# EAGLE board breakout (EAGLE 7.1.0)
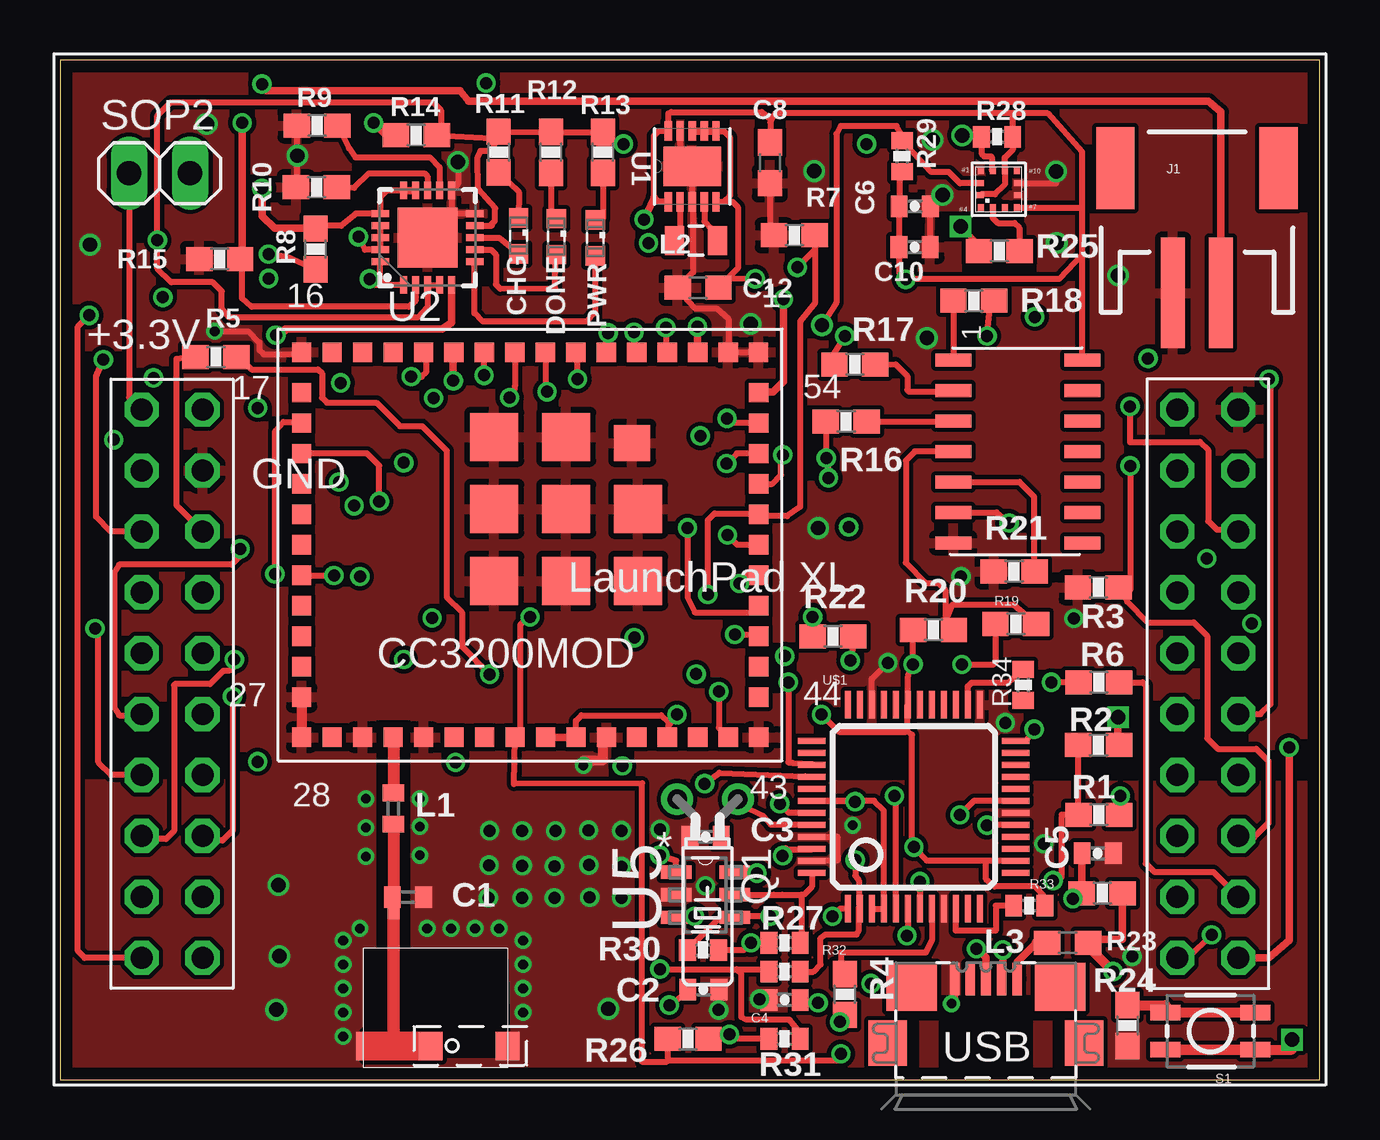
[diagram p0: board, top side]
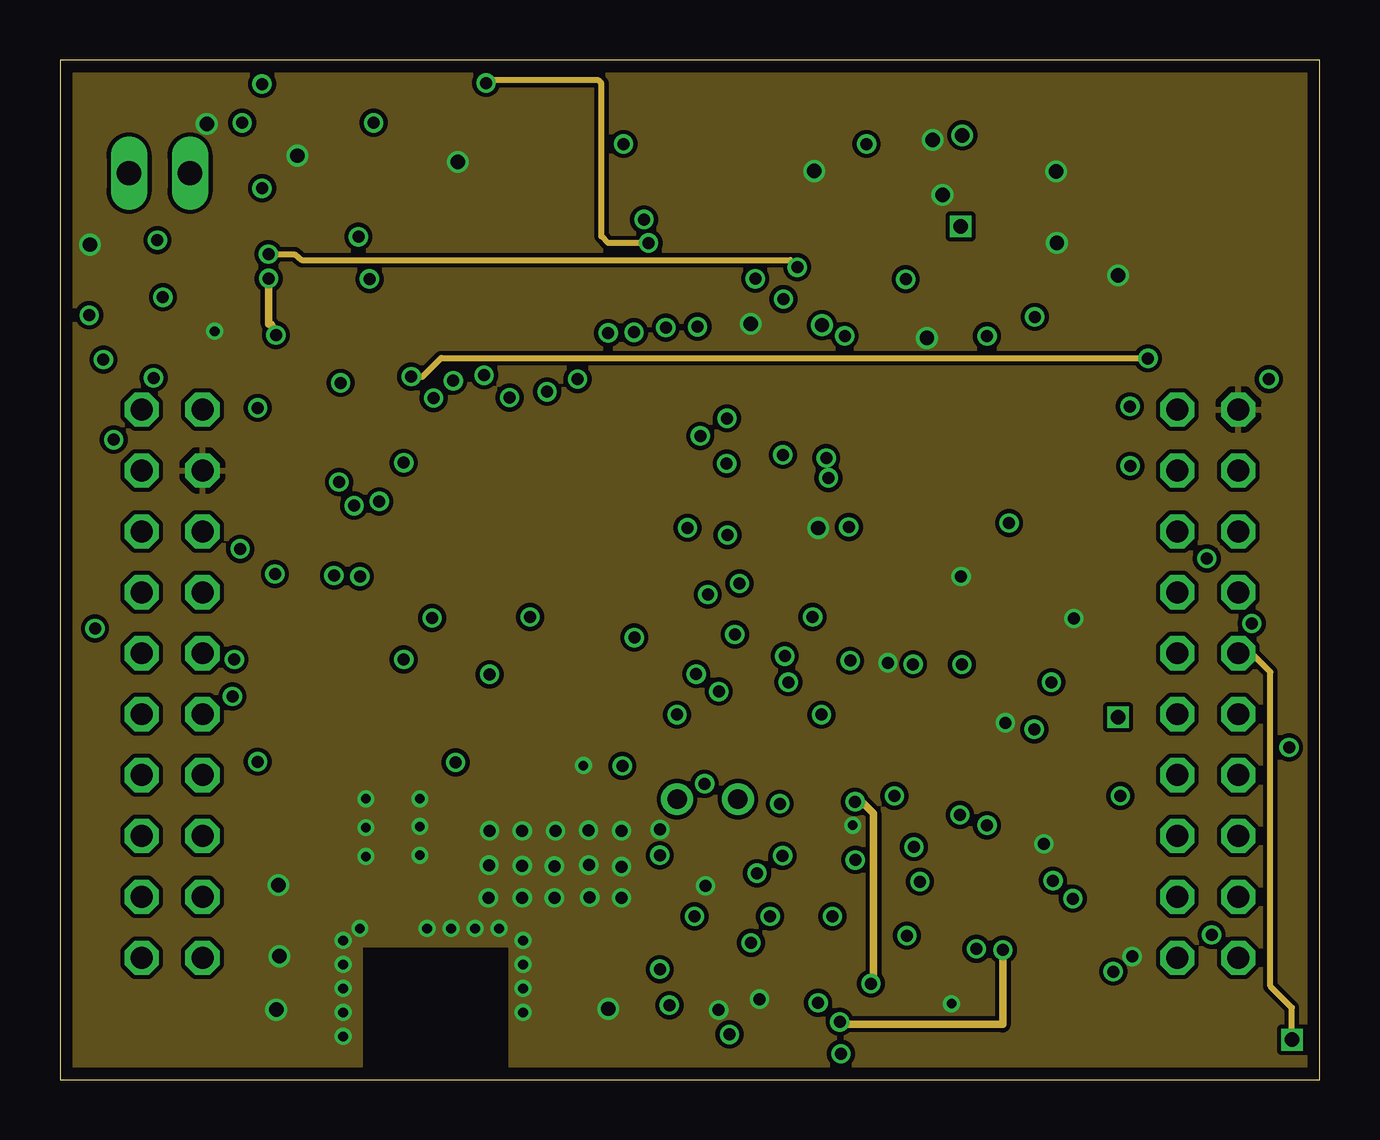
[diagram p1: board, inner layer Route2]
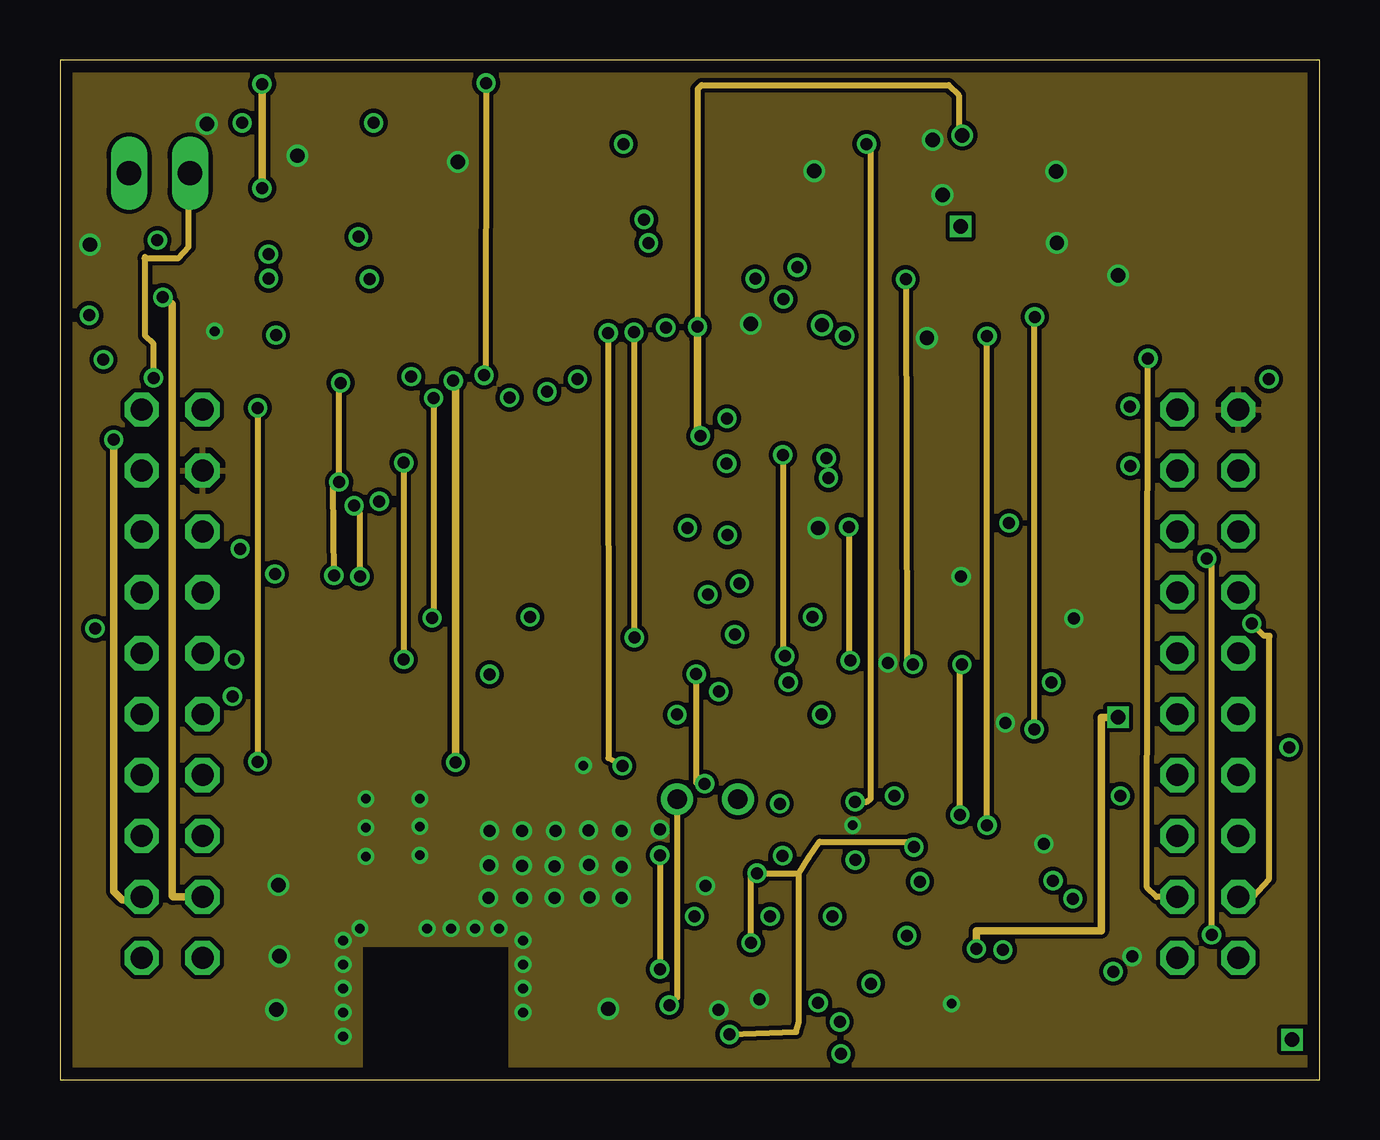
[diagram p2: board, inner layer Route15]
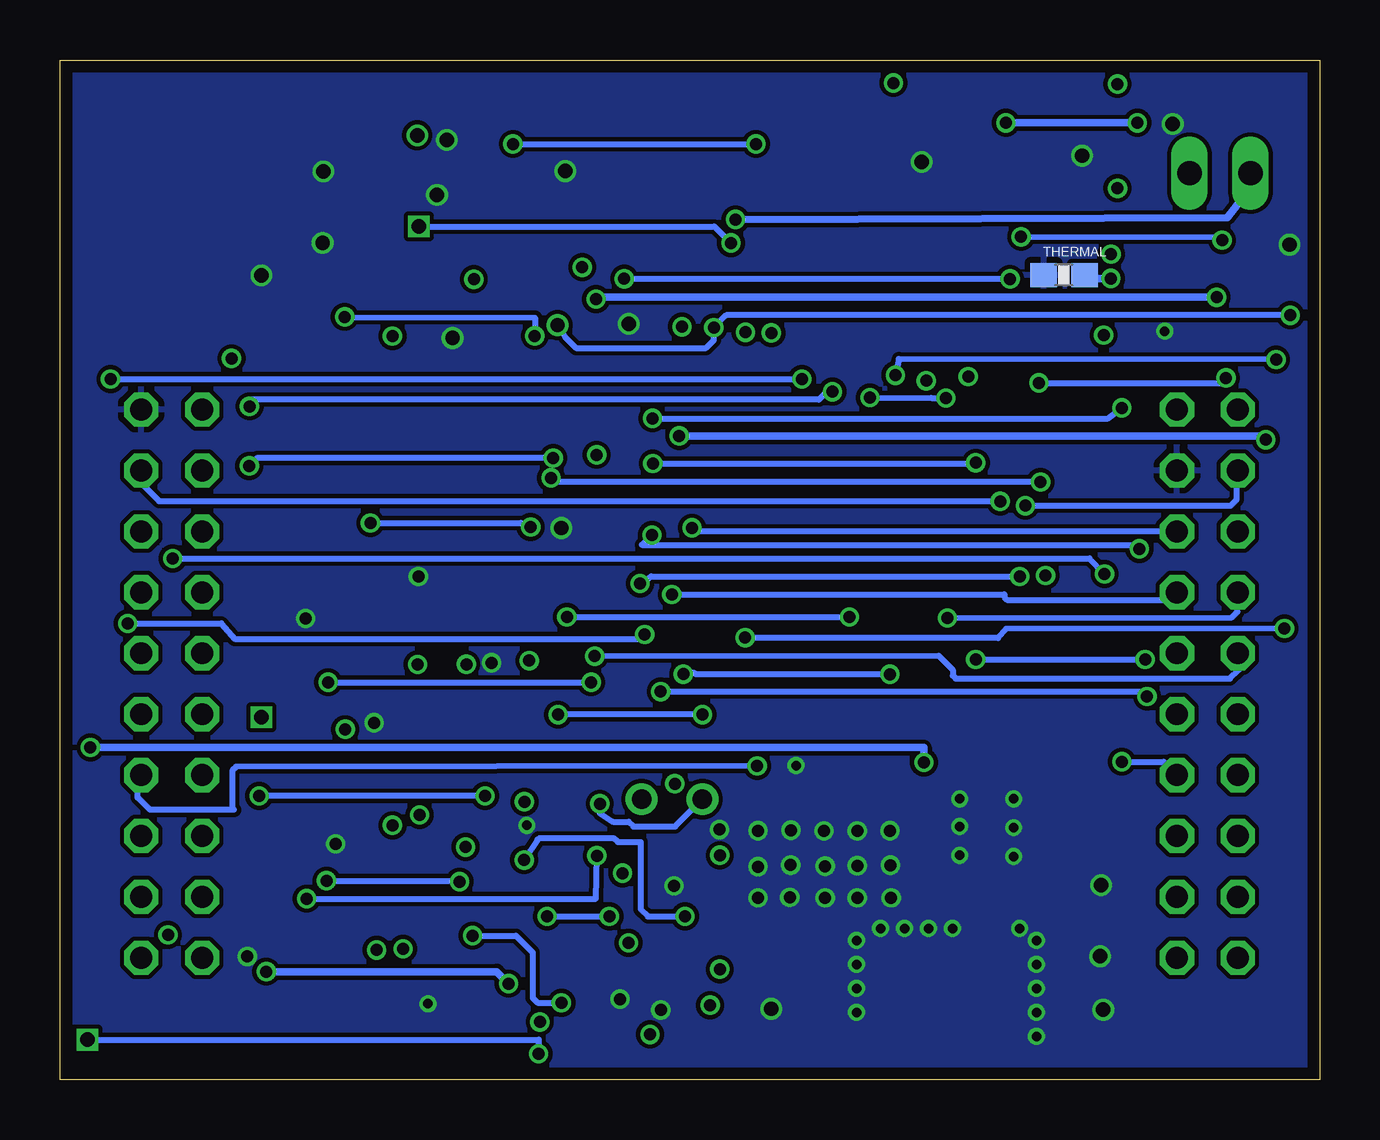
[diagram p3: board, bottom side, seen from below]

Size 52.5 x 42.5 mm. Coordinates in mm from the lower left corner, seen from the top.
Outline: 0,0 52.5,0 52.5,42.5 0,42.5 0,0
Copper layers (1*2*15*16): Top 0.035mm / dielectric 10mil / Route2 0.035mm / dielectric 10mil / Route15 0.035mm / dielectric 10mil / Bottom 0.035mm
Design rules "EagleRules *": minimum track width 7mil, minimum drill 12mil, track to track 7mil, track to pad 7mil, pad to pad 7mil, via to via 7mil, smd to smd 0mil, copper to edge 20mil, drill to drill 10mil, minimum pad ring 10mil, minimum via ring 6mil, stop-mask expansion 2mil, vias tented up to drill 25mil, thermal gap 10mil

## Footprints (pad centres in the part's own frame; a part is rotated, then mirrored left to right if it is on the bottom)
ANT = smd 1 x 1.2: ANT_FEED 2.8,0.9; ANT_GND 6,0.9 | smd 0.5 x 0.5: FEED2 1.25,6.45 | smd 0.3 x 1.2: GND_LEFT -0.15,0.9
C0402 = smd 0.7 x 0.9: 1 -0.65,0; 2 0.65,0
0402-CAP = smd 0.7 x 0.9: 1 -0.65,0; 2 0.65,0
C0603 = smd 1.1 x 1: 1 -0.85,0; 2 0.85,0
CC3200MOD = smd 0.8 x 0.8: P1 9.52,8.025; P2 8.25,8.025; P3 6.98,8.025; P4 5.71,8.025; P5 4.44,8.025; P6 3.17,8.025; P7 1.9,8.025; P8 0.63,8.025; P9 -0.64,8.025; P10 -1.91,8.025; P11 -3.18,8.025; P12 -4.45,8.025; P13 -5.72,8.025; P14 -6.99,8.025; P15 -8.26,8.025; P16 -9.53,8.025; P17 -9.525,6.35; P18 -9.525,5.08; P19 -9.525,3.81; P20 -9.525,2.54; P21 -9.525,1.27; P22 -9.525,0; P23 -9.525,-1.27; P24 -9.525,-2.54; P25 -9.525,-3.81; P26 -9.525,-5.08; P27 -9.525,-6.35; P28 -9.525,-8.02; P29 -8.255,-8.02; P30 -6.985,-8.02; P31 -5.715,-8.02; P32 -4.445,-8.02; P33 -3.175,-8.02; P34 -1.905,-8.02; P35 -0.635,-8.02; P36 0.635,-8.02; P37 1.905,-8.02; P38 3.175,-8.02; P39 4.445,-8.02; P40 5.715,-8.02; P41 6.985,-8.02; P42 8.255,-8.02; P43 9.525,-8.02; P44 9.525,-6.35; P45 9.525,-5.08; P46 9.525,-3.81; P47 9.525,-2.54; P48 9.525,-1.27; P49 9.525,0; P50 9.525,1.27; P51 9.525,2.54; P52 9.525,3.81; P53 9.525,5.08; P54 9.525,6.35 | smd 1.5 x 1.5: P55 4.25,4.25 | smd 2 x 2: P56 1.5,-1.5; P57 -1.5,4.5; P58 4.5,1.5; P59 1.5,1.5; P60 -1.5,1.5; P61 4.5,-1.5; P62 1.5,4.5; P63 -1.5,-1.5
SML0603 = smd 0.8 x 0.8: A 0.75,0; C -0.75,0
JST-2-SMD = smd 1 x 4.6: 1 -1,-3.7; 2 1,-3.7 | smd 1.6 x 3.4: NC1 -3.4,1.5; NC2 3.4,1.5
0805 = smd 0.8 x 1.2: 1 -0.9,0; 2 0.9,0
0603 = smd 1.1 x 1: 1 -0.85,0; 2 0.85,0
TC26H = drill 0.813: 1 -1.27,0; 2 1.27,0
0603-RES = smd 1.1 x 1: 1 -0.85,0; 2 0.85,0
0402-RES = smd 0.7 x 0.9: 1 -0.65,0; 2 0.65,0
TACTILE_SWITCH_SMD = smd 1.25 x 0.65: 1 -1.875,0.775; 2 1.875,0.775; 3 -1.875,-0.775; 4 1.875,-0.775
1X02 = drill 1.016 long: 1 -1.27,0; 2 1.27,0
SON50P300X300X100-11N = smd 0.813 x 0.305: 1 -1.473,0.991; 2 -1.473,0.508; 3 -1.473,0; 4 -1.473,-0.508; 5 -1.473,-0.991; 6 1.473,-0.991; 7 1.473,-0.508; 8 1.473,0; 9 1.473,0.508; 10 1.473,0.991 | smd 1.651 x 2.388: 11 0,0
QFN20-4X4 = smd 0.73 x 0.3: 1 -1.965,1; 2 -1.965,0.5; 3 -1.965,0; 4 -1.965,-0.5; 5 -1.965,-1; 11 1.965,-1; 12 1.965,-0.5; 13 1.965,0; 14 1.965,0.5; 15 1.965,1 | smd 0.3 x 0.73: 6 -1,-1.965; 7 -0.5,-1.965; 8 0,-1.965; 9 0.5,-1.965; 10 1,-1.965; 16 1,1.965; 17 0.5,1.965; 18 0,1.965; 19 -0.5,1.965; 20 -1,1.965 | smd 2.5 x 2.5: 21 0,0
SOT95P280X145-6N = smd 1.27 x 0.559: 1 -1.219,0.94; 2 -1.219,0; 3 -1.219,-0.94; 4 1.219,-0.94; 5 1.219,0; 6 1.219,0.94
LAUNCHPADXL = drill 0.914 octagon: 3.3V -22.86,8.16; 5V -20.32,8.16; GND1 -20.32,5.62; GND2 22.86,8.16; GPIO_00 -20.32,-14.7; GPIO_01 22.86,-12.16; GPIO_02 -20.32,3.08; GPIO_03 -22.86,5.62; GPIO_03_NC -20.32,-2; GPIO_04 -22.86,-4.54; GPIO_04_NC -20.32,-4.54; GPIO_05 -20.32,0.54; GPIO_05_NC 20.32,-9.62; GPIO_06 -22.86,-2; GPIO_07 -22.86,-9.62; GPIO_07_NC 20.32,-7.08; GPIO_08 -20.32,-7.08; GPIO_09 -20.32,-12.16; GPIO_09_GPIO_00_NC 20.32,0.54; GPIO_10 -22.86,-12.16; GPIO_10_NC 20.32,5.62; GPIO_11 -22.86,-14.7; GPIO_11_NC 20.32,8.16; GPIO_12_TX -22.86,0.54; GPIO_13_RX -22.86,3.08; GPIO_14_SP_CLK -22.86,-7.08; GPIO_15_MISO 22.86,-7.08; GPIO_16_MOSI 22.86,-4.54; GPIO_17_CS 22.86,3.08; GPIO_22 22.86,-14.7; GPIO_23 20.32,-12.16; GPIO_24 20.32,-14.7; GPIO_24_NC 20.32,3.08; GPIO_25 22.86,-9.62; GPIO_25_GPIO_07_NC 20.32,-2; GPIO_28 22.86,5.62; GPIO_28_NC 20.32,-4.54; GPIO_30 -20.32,-9.62; GPIO_31 22.86,0.54; RESET_OUT 22.86,-2
LQFP-48 = smd 0.254 x 1.143: 1 -2.75,-4.25; 2 -2.25,-4.25; 3 -1.75,-4.25; 4 -1.25,-4.25; 5 -0.75,-4.25; 6 -0.25,-4.25; 7 0.25,-4.25; 8 0.75,-4.25; 9 1.25,-4.25; 10 1.75,-4.25; 11 2.25,-4.25; 12 2.75,-4.25; 25 2.75,4.25; 26 2.25,4.25; 27 1.75,4.25; 28 1.25,4.25; 29 0.75,4.25; 30 0.25,4.25; 31 -0.25,4.25; 32 -0.75,4.25; 33 -1.25,4.25; 34 -1.75,4.25; 35 -2.25,4.25; 36 -2.75,4.25 | smd 1.143 x 0.254: 13 4.25,-2.75; 14 4.25,-2.25; 15 4.25,-1.75; 16 4.25,-1.25; 17 4.25,-0.75; 18 4.25,-0.25; 19 4.25,0.25; 20 4.25,0.75; 21 4.25,1.25; 22 4.25,1.75; 23 4.25,2.25; 24 4.25,2.75; 37 -4.25,2.75; 38 -4.25,2.25; 39 -4.25,1.75; 40 -4.25,1.25; 41 -4.25,0.75; 42 -4.25,0.25; 43 -4.25,-0.25; 44 -4.25,-0.75; 45 -4.25,-1.25; 46 -4.25,-1.75; 47 -4.25,-2.25; 48 -4.25,-2.75
DECADE-SO-14 = smd 0.55 x 1.5: 1 -3.6,-2.88; 2 -2.33,-2.88; 3 -1.06,-2.88; 4 0.21,-2.88; 5 1.48,-2.88; 6 2.75,-2.88; 7 4.02,-2.88; 8 4.02,2.5; 9 2.75,2.5; 10 1.48,2.5; 11 0.21,2.5; 12 -1.06,2.5; 13 -2.33,2.5; 14 -3.6,2.5
BMA222 = smd 0.25 x 0.3: P1 -0.75,0.775; P4 -0.75,-0.775; P5 -0.25,-0.775; P6 0.25,-0.775; P7 0.75,-0.775; P10 0.75,0.775; P11 0.25,0.775; P12 -0.25,0.775 | smd 0.3 x 0.25: P2 -0.775,0.25; P3 -0.775,-0.25; P8 0.775,-0.25; P9 0.775,0.25
ZX62R-B-5P = smd 1.35 x 0.4: 1 2.675,-1.3; 2 2.675,-0.65; 3 2.675,0; 4 2.675,0.65; 5 2.675,1.3 | smd 1.9 x 1.6: M1 0,-4.1; M2 0,4.1 | smd 2 x 2.1: M3 2.35,3.1; M4 2.35,-3.1

## Placement (x,y rotation side)
ANT_PAD  ANT  [ANT]  12.65,0.5 0 top
C1  1pF  [C0402]  14.5,7.6 0 top
C2  27pF  [0402-CAP]  26.82,3.75 180 top
C3  27pF  [0402-CAP]  26.91,10.12 0 top
C4  33nF  [0402-CAP]  30.2,3.32 0 top
C5  0.1uF  [0402-CAP]  43.25,9.43 180 top
C6  .1uF  [0402-CAP]  35.63,36.4 0 top
C8  10uF  [C0603]  29.59,38.22 270 top
C10  .1uF  [0402-CAP]  35.62,34.7 0 top
C12  10uF  [C0603]  26.6,33 180 top
CC3200MOD  CC3200  [CC3200MOD]  19.6,22.29 0 top
CHG  [SML0603]  19.11,35.17 270 top
DONE  [SML0603]  20.69,35.14 270 top
J1  [JST-2-SMD]  47.39,36.49 0 top
L1  3.6nH  [C0402]  13.9,11.3 90 top
L2  2.2uH  [0805]  26.51,34.96 180 top
L3  [0603]  42,5.7 0 top
PWR  [SML0603]  22.31,35.08 270 top
Q1  16Mhz  [TC26H]  26.99,11.69 180 top
R1  1.5K  [0603-RES]  43.3,11.04 0 top
R2  28  [0603-RES]  43.29,13.94 180 top
R3  2.7K  [0603-RES]  43.28,20.52 180 top
R4  28  [0603-RES]  32.72,3.55 90 top
R5  33  [0603-RES]  6.5,30.12 180 top
R6  33  [0603-RES]  43.3,16.56 0 top
R7  100K  [0603-RES]  30.61,35.19 0 top
R8  470K  [0603-RES]  10.66,34.62 90 top
R9  2K  [0603-RES]  10.72,39.77 0 top
R10  100K  [0603-RES]  10.69,37.19 0 top
R11  1K  [0603-RES]  18.29,38.66 90 top
R12  1K  [0603-RES]  20.46,38.65 90 top
R13  1K  [0603-RES]  22.63,38.65 90 top
R14  1K  [0603-RES]  14.85,39.36 0 top
R15  1K  [0603-RES]  6.66,34.2 0 top
R16  33  [0603-RES]  32.77,27.43 0 top
R17  33  [0603-RES]  33.13,29.81 0 top
R18  33  [0603-RES]  38.09,32.46 180 top
R19  33  [0603-RES]  39.84,18.99 0 top
R20  10k  [0603-RES]  36.41,18.75 180 top
R21  33  [0603-RES]  39.77,21.18 0 top
R22  33  [0603-RES]  32.22,18.47 0 top
R23  470  [0603-RES]  43.44,7.77 0 top
R24  33  [0603-RES]  44.49,2.25 270 top
R25  0R  [0603-RES]  39.15,34.53 0 top
R26  100K  [0603-RES]  26.18,1.7 180 top
R27  10K  [0402-RES]  30.2,5.7 180 top
R28  33K  [0402-RES]  39.06,39.3 0 top
R29  33K  [0402-RES]  35.1,38.49 270 top
R30  10K  [0402-RES]  26.8,5.4 0 top
R31  10K  [0402-RES]  30.2,1.7 180 top
R32  2.2K  [0402-RES]  30.2,4.5 180 top
R33  10K  [0402-RES]  40.4,7.25 180 top
R34  10K  [0402-RES]  40.15,16.45 90 top
S1  [TACTILE_SWITCH_SMD]  47.95,2.02 180 top
SOP2  [1X02]  4.15,37.78 180 top
THERMAL  10K  [0603-RES]  10.65,33.54 0 bottom
U1  TPS63001DRCT  [SON50P300X300X100-11N]  26.35,38.06 90 top
U2  MCP73871-2CCI/ML  [QFN20-4X4]  15.32,35.09 90 top
U5  93LC46BT-I/OT  [SOT95P280X145-6N]  26.9,7.7 0 top
U11  XL  [LAUNCHPADXL]  26.26,19.77 0 top
U$1  FT2232D  [LQFP-48]  35.59,11.37 0 top
U$3  DECADE-74LVC125A  [DECADE-SO-14]  40.11,26.39 270 top
U$4  BMA220  [BMA222]  39.13,37.11 0 top
USB  MICRO-USB-ZX62R-B-5P  [ZX62R-B-5P]  38.59,1.51 90 top

## Library data of the parts
ANT_PAD = Antenna
C1 C8 C12 = rcl
C2-C5 L2 R2 R4 R9-R15 R25 R27-R34 THERMAL = SparkFun-Passives
C6 C10 = SparkFun-Capacitors
CC3200MOD = cc3200mod
CHG DONE PWR = led
J1 = SparkFun-Connectors; PROD_ID: CONN-08352
L1 L3 S1 = Spark
Q1 = crystal; OC_FARNELL: unknown; OC_NEWARK: unknown
R1 R3 R5-R8 R16-R24 R26 = SparkFun-Resistors
SOP2 = pinhead
U1 = TPS63001; MPN: TPS63001DRCT; OC_FARNELL: 1652399; OC_NEWARK: 22M1824; PACKAGE: SON-10; SUPPLIER: TEXAS INSTRUMENTS
U2 = microchip-battery; LBO: 3.1 V; SAFETYTIMER: 6 Hours; VREG: 4.20V
U5 = Microchip_By_element14_Batch_1; MPN: 93LC46BT-I/OT; OC_FARNELL: 1556164; OC_NEWARK: 75M3689; PACKAGE: SOT-6; SUPPLIER: Microchip
U11 = LaunchPadXL
U$1 = SparkFun-DigitalIC
U$3 = DECADE-libraries
U$4 = bma220
USB = con-hirose

## Nets
+5V_USB: L3.2 R11.2 R12.2 R13.2 R14.2 R23.2 U2.3 U2.4 U2.9 U2.17 U2.18 U2.19 U$1.3 U$1.4 U$1.42
+BATT: J1.2 R8.2 U2.14 U2.15 U2.16
DBG_RST_N: R19.2 R20.1 U$3.4
DBGEN_N: R18.2 U$3.1
FT_SK: R17.2 U$3.2
FTDI_RX: CC3200MOD.P46 R6.2 U11.GPIO_01
FTDI_TX: CC3200MOD.P47 R5.2 U11.GPIO_02
GND: ANT_PAD.ANT_GND ANT_PAD.GND_LEFT C1.2 C2.1 C3.1 C4.1 C5.1 C6.2 C8.2 C10.2 C12.2 CC3200MOD.P1 CC3200MOD.P2 CC3200MOD.P16 CC3200MOD.P27 CC3200MOD.P28 CC3200MOD.P30 CC3200MOD.P32 CC3200MOD.P38 CC3200MOD.P43 CC3200MOD.P55 CC3200MOD.P56 CC3200MOD.P57 CC3200MOD.P58 CC3200MOD.P59 CC3200MOD.P60 CC3200MOD.P61 CC3200MOD.P62 CC3200MOD.P63 J1.1 R3.2 R7.1 R9.1 R10.1 R15.1 R21.1 R24.2 THERMAL.1 U1.3 U1.9 U1.11 U2.10 U2.11 U2.21 U5.2 U11.GND1 U11.GND2 U$1.9 U$1.18 U$1.25 U$1.34 U$1.45 U$1.47 U$3.7 U$4.P1 U$4.P8 U$4.P9 USB.5
GPIO_05: CC3200MOD.P50 R7.2 R8.1 U11.GPIO_05
GPIO_10: CC3200MOD.P3 R28.1 U11.GPIO_10 U$4.P12
GPIO_11: CC3200MOD.P4 R29.1 U11.GPIO_11 U$4.P2
GPIO_13: CC3200MOD.P10 R25.1 U11.GPIO_13_RX
GPIO_22: CC3200MOD.P11 U11.GPIO_22
JTAG_TDI: CC3200MOD.P12 U11.GPIO_23
JTAG_TDO: CC3200MOD.P18 U11.GPIO_24
N$2: ANT_PAD.FEED2 C1.1 L1.1
N$3: CC3200MOD.P31 L1.2
N$7: R1.2 U$1.5
N$8: CC3200MOD.P6 U11.GPIO_15_MISO
N$10: CC3200MOD.P7 U11.GPIO_16_MOSI
N$11: CC3200MOD.P8 U11.GPIO_17_CS
N$12: CC3200MOD.P5 U11.GPIO_14_SP_CLK
N$13: CC3200MOD.P19 U11.GPIO_28
N$14: CC3200MOD.P42 U11.GPIO_30
N$15: L3.1 USB.1
N$16: R4.1 USB.2
N$17: R9.2 U2.12
N$18: CC3200MOD.P51 U11.GPIO_06
N$19: CC3200MOD.P49 U11.GPIO_04
N$20: R10.2 U2.13
N$21: CC3200MOD.P52 U11.GPIO_07
N$22: CC3200MOD.P53 U11.GPIO_08
N$23: CC3200MOD.P54 U11.GPIO_09
N$24: R2.1 USB.3
N$25: CC3200MOD.P9 U11.GPIO_12_TX
N$26: PWR.A U2.6
N$27: CC3200MOD.P48 U11.GPIO_03
N$28: THERMAL.2 U2.5
N$29: L2.1 U1.4
N$30: L2.2 U1.2
N$31: DONE.A U2.7
N$32: CHG.A U2.8
N$33: CHG.C R11.1
N$35: DONE.C R12.1
N$36: PWR.C R13.1
N$37: R14.1 R15.2 U2.2
N$38: C2.2 Q1.2 U$1.43
N$39: R27.1 U5.5 U$1.48
N$40: C3.2 Q1.1 U$1.44
N$41: R30.1 U5.4 U$1.1
N$42: R32.1 U5.3 U$1.2
N$43: C4.2 U$1.6
N$44: R5.1 U$1.40
N$45: R6.1 U$1.39
N$46: R17.1 U$1.24
N$47: R19.1 U$1.19
N$48: R18.1 U$1.17
N$49: R21.2 U$3.5
N$50: R22.2 U$3.6
N$51: C5.2 R23.1 U$1.46
N$52: R25.2 U$4.P5
N$53: R24.1 S1.3 S1.4
N$54: R31.1 R32.2 U5.1
N$55: R33.2 U$1.10
N$56: R34.2 U$1.26
N_RESET: CC3200MOD.P35 R22.1 R26.2 S1.1 S1.2 U11.RESET_OUT
OUT: C12.1 U1.5 U1.6 U1.7 U1.8 U2.1 U2.20
SOP2: CC3200MOD.P23 R3.1 R16.1 SOP2.1 U11.GPIO_25
TCK: R16.2 U$3.3
USB_DM: R4.2 U$1.8
USB_DP: R1.1 R2.2 U$1.7
VCC: C6.1 C8.1 C10.1 CC3200MOD.P36 CC3200MOD.P37 CC3200MOD.P40 R20.2 R26.1 R27.2 R28.2 R29.2 R30.2 R31.2 R33.1 SOP2.2 U1.1 U1.10 U5.6 U11.3.3V U$1.14 U$1.31 U$3.14 U$4.P3 U$4.P7 U$4.P11

## Tracks (layer width: path | path; a pad name or v marks a point on that pad's centre or on a via)
+5V_USB  (via drill 0.5)
  Top 0.254: U2.17 U2.18 U2.19 12.71,34.59 v12.44,35.13 | U2.4 U2.3 15.32,32.19 14.92,31.77 7.06,31.77 6.74,32.13 6.74,32.86 6.37,33.23 4.64,33.23 4.06,33.81 v4.06,34.99 4.06,40.18 4.61,40.73 15.55,40.73 15.88,40.4 15.88,39.41 R14.2 18.01,39.24 R11.2 | R11.2 20.48,39.5 R12.2 R13.2 22.61,39 v23.49,39 | U$1.3 U$1.4 34.34,11.21 33.93,11.62 U$1.42 33.1,11.62 v33.14,11.58 | R11.2 18.04,38.71 17.53,38.71 17.41,38.45 17.42,37.11 18.14,36.32 18.13,35.8 17.92,35.59 U2.9 17.98,35.59 18.03,35.64
  Top 0.305: R23.2 44.29,5.85 43,5.85
  Top 0.406: 22.56,38.95 R13.2 | 43,5.85 L3.2 42.85,5.55 v43.9,4.5
  Route2 0.305: v33.14,11.58 33.42,11.58 33.9,11.1 33.9,4.1 v33.8,4
  Route15 0.254: v33.14,11.58 33.63,11.58 33.8,11.71 33.8,38.86 v33.62,39
  Bottom 0.254: v33.62,39 v23.49,39 | v12.44,35.13 4.1,35.12 v4.06,34.99
  Bottom 0.305: v43.9,4.5 34.3,4.5 v33.8,4
+BATT  (via drill 0.5)
  Top 0.254: U2.15 13.61,37.05 13.35,36.79 U2.16 | U2.16 | U2.16 12.34,36.09 11.72,35.59 10.78,35.59 R8.2
  Top 0.305: U2.15 U2.14 | J1.2 48.39,40.34 47.87,40.79 17.04,40.79 16.68,41.22 8.62,41.22 v8.42,41.5 | v8.42,37.15 8.42,36 8.94,35.48 R8.2
  Route15 0.305: v8.42,41.5 v8.42,37.15
DBG_RST_N
  Top 0.254: U$3.4 35.63,26.18 35.25,25.8 35.25,21.55 36.1,20.7 36.6,20.7 36.9,20.4 36.9,18.54 R20.1 36.86,18.96 37.2,19.8 39.73,19.8 R19.2
DBGEN_N
  Top 0.254: R18.2 U$3.1
FT_SK
  Top 0.254: R17.2 34.83,29.82 35.32,29.33 35.32,28.74 35.39,28.67 37.18,28.67 U$3.2
FTDI_RX  (via drill 0.5)
  Top 0.254: R6.2 45.12,16.56 45.26,16.42 45.26,9.01 45.62,8.65 48.08,8.65 U11.GPIO_01 | v28.13,18.55 29.05,18.55 CC3200MOD.P46
  Route15 0.254: U11.GPIO_01 49.72,7.61 50.4,8.37 50.4,18.43 50.42,18.49 50.18,18.49 v49.68,19.01
  Bottom 0.254: v49.68,19.01 45.78,19.02 45.22,18.37 28.36,18.37 v28.13,18.55
FTDI_TX  (via drill 0.5)
  Top 0.254: R5.2 5.33,30.1 4.85,30.04 4.85,23.94 U11.GPIO_02 | v26.16,23 26.16,20.1 26.46,19.47 29.08,19.47 CC3200MOD.P47
  Bottom 0.254: U11.GPIO_02 26.12,22.85 v26.16,23
GND  (via drill 0.4, 0.4 pad 0.25, 0.5, 0.6)
  Top 0.254: U1.9 25.85,38.15 26.35,38.15 U1.11 U1.3 26.39,36.59 26.39,33.65 C12.2 25.75,32.94 26.47,32.15 27.36,32.15 27.86,31.72 27.86,30.32 CC3200MOD.P2 CC3200MOD.P1 | U2.10 15.32,36.09 U2.21 15.32,36.03 16.32,36.03 U2.11 16.58,37.32 v16.58,38.25 | U$1.45 32.4,10.12 32.4,9.12 U$1.47 | R9.1 9.87,37.22 R10.1 | C8.2 29.59,35.36 R7.1 | C2.1 | USB.5 37.29,3.29 v37.16,3.16 | v6.45,31.19 7.84,31.19 8.31,30.72 8.31,30.4 8.48,30.23 9.98,30.23 CC3200MOD.P16 | C6.2 C10.2 | U$4.P9 41.52,37.36 v41.52,37.85 | U$1.34 33.84,16.7 v34.51,17.37
  Top 0.406: CC3200MOD.P27 CC3200MOD.P28 | CC3200MOD.P38 22.61,14.27 22.61,13.29 21.82,13.29 v21.82,13.09 | CC3200MOD.P16 10.04,30.32
  other vias: 12.75,9.3 15,9.35 15,10.55 15,11.7 11.8,1.8 11.8,2.8 11.8,3.8 11.8,4.8 11.8,5.8 12.5,6.3 15.3,6.3 16.3,6.3 17.3,6.3 18.3,6.3 19.3,5.8 19.3,4.8 19.3,3.8 19.3,2.8 12.75,10.5 12.75,11.7 44.69,5.13 22.85,2.95 9.01,2.91 9.14,5.14 9.1,8.11 1.25,34.8 31.61,22.99 6.12,39.83 9.9,38.51 28.79,31.5 33.04,10.6 44.1,33.52 31.43,37.87 36.13,30.91 41.55,34.88 36.37,39.17 36.78,36.88 17.91,10.37 17.89,8.93 17.86,7.57 19.27,7.57 19.27,8.91 19.27,10.36 20.66,10.36 20.61,8.89 20.61,7.57 22.08,7.59 22.05,8.94 22.03,10.39 23.41,10.37 23.41,8.87 23.41,7.57 25.01,10.42 29.15,3.35 27.45,2.9 26.91,8.07 39.41,14.87 42.26,19.22 37.56,20.97 41.01,9.82
  pour Top (no thermals): 52.5,12.4 0,12.5 0,0.3 52.5,0.3
  pour Top: -0.1,12.4 52.5,12.6 52.5,42 -0.2,42
  pour Bottom (no thermals): 8.3,0.3 8.3,12.3 24.3,12.2 24.3,0.2
  pour Route2: 0,0 52.5,0 52.5,42.35 0,42.25
  pour Bottom: 0,0 52.5,0 52.5,44.7 0,44.7
  pour Route15: 0,0 52.5,0 52.5,43.8 0,43.8
GPIO_05  (via drill 0.5)
  Top 0.254: v27,20.22 27.01,23.32 27.29,23.6 29.09,23.6 CC3200MOD.P50 29.2,23.48 30.31,23.48 30.85,23.87 30.85,31.6 31.46,32.36 R7.2 31.46,34.59 v30.73,33.86 | v8.69,34.41 9.42,34.32 R8.1
  Route2 0.254: v8.69,34.41 9.78,34.4 10.08,34.16 30.43,34.16 v30.73,33.86
  Bottom 0.254: v27,20.22 13.15,20.22 13.13,20.2 13.13,20.1 13.03,20 6.25,20 U11.GPIO_05
GPIO_10  (via drill 0.5, 0.6)
  Top 0.254: U$4.P12 38.84,37.92 38.84,38.45 38.81,38.48 38.53,38.48 38.41,38.6 R28.1 38.35,39.36 v37.61,39.36
  Top 0.305: CC3200MOD.P3 v26.58,31.37 v26.57,31.38
  Route15 0.254: v37.61,39.36 37.46,39.51 37.46,41.03 37.04,41.45 26.74,41.45 26.58,41.29 26.58,30.88 26.57,30.87
  Route15 0.305: v26.57,31.38 26.57,30.87 26.57,27.03 v26.69,26.83 | v2.24,26.67 2.24,7.85 2.6,7.49 3.28,7.49 U11.GPIO_10
  Bottom 0.305: v26.69,26.83 2.48,26.83 v2.24,26.67
GPIO_11  (via drill 0.5, 0.6)
  Top 0.254: U11.GPIO_11 1.03,5.07 0.74,5.36 0.74,31.38 v1.22,31.86 | v25.25,31.34 25.25,30.38 CC3200MOD.P4 | U$4.P2 37.52,37.36 37.05,37.83 36.31,37.83 R29.1 35.09,39.37 34.87,39.74 32.54,39.74 32.36,39.41 32.36,32.38 v31.76,31.45
  Bottom 0.254: v1.22,31.86 24.73,31.86 v25.25,31.34 25.25,30.82 25.57,30.5 31,30.5 31.44,30.94 v31.76,31.45
GPIO_13  (via drill 0.5, 0.6)
  Top 0.254: U11.GPIO_13_RX 2.1,22.85 1.5,23.45 1.5,29.31 v1.81,30.01 | v17.68,29.36 CC3200MOD.P10 | R25.1 38.3,34.8 v37.54,35.56
  Route2 0.254: v24.53,34.87 22.85,34.87 22.57,35.15 22.57,41.53 22.45,41.65 17.97,41.65 v17.76,41.54
  Route15 0.254: v17.76,41.54 17.73,29.41 v17.68,29.36
  Bottom 0.254: v1.81,30.01 17.54,30.04 v17.68,29.36 | v37.54,35.56 25.22,35.56 v24.53,34.87
GPIO_22  (via drill 0.5)
  Top 0.305: U11.GPIO_22 50.39,5.07 51.23,5.8 v51.23,13.84 | v16.39,29.13 16.39,30.29 CC3200MOD.P11
  Route15 0.305: v16.49,13.22 16.49,29.03 v16.39,29.13
  Bottom 0.305: v51.23,13.84 16.5,13.84 v16.49,13.22
JTAG_TDI  (via drill 0.5)
  Top 0.254: v14.64,29.3 15.08,29.3 15.28,29.5 15.28,30.18 CC3200MOD.P12
  Route2 0.254: v14.64,29.3 15.11,29.3 15.89,30.08 45.29,30.08 v45.35,30.06
  Route15 0.254: U11.GPIO_23 45.71,7.61 45.31,8.01 v45.35,30.06
JTAG_TDO  (via drill 0.5)
  Top 0.254: U11.GPIO_24 47.04,5.07 v48,6.03 | v8.96,21.07 8.97,27.04 9.31,27.41 10.04,27.41 CC3200MOD.P18
  Route15 0.254: v48,6.03 48,21.52 v47.8,21.72
  Bottom 0.254: v47.8,21.72 9.59,21.72 v8.96,21.07
N$1
  cutout Top: 12.8,0.9 12.65,0.5 12.65,5.5 18.65,5.5 18.75,0.9
N$2
  Top 0.01: C1.1 13.9,7.6 L1.1
  Top 0.5: L1.1 ANT_PAD.FEED2
N$3
  Top 0.01: CC3200MOD.P31 13.9,14.14
  Top 0.5: 13.9,14.14 L1.2
N$4
  cutout Top: 13.2,14.95 13.2,5.5 14.6,5.5 14.6,14.95
N$5
  cutout Route2: 12.66,0.51 12.66,5.49 18.63,5.49 18.66,5.49 18.66,0.51
N$6
  cutout Route15: 12.66,0.51 12.66,5.51 18.66,5.51 18.66,0.51
N$7  (via drill 0.5)
  Top 0.254: U$1.5 34.84,11.6 v34.78,11.82 | v44.2,11.82 44.1,11.09 R1.2
  Bottom 0.254: v34.78,11.82 v44.2,11.82
N$8  (via drill 0.5)
  Top 0.254: CC3200MOD.P6 22.77,31.12 v22.85,31.12
  Route15 0.254: v22.85,31.12 22.86,13.4 v23.44,13.07
  Bottom 0.254: v23.44,13.07 45.16,13.04 45.32,12.88 45.32,11.32 45.24,11.24 48.75,11.24 49.27,11.76 49.27,12.54 U11.GPIO_15_MISO
N$10  (via drill 0.5)
  Top 0.254: U11.GPIO_16_MOSI 50.04,15.23 50.46,15.65 50.46,29.13 v50.39,29.2 | v21.57,29.2 21.57,30.25 CC3200MOD.P7
  Bottom 0.254: v50.39,29.2 v21.57,29.2
N$11  (via drill 0.5)
  Top 0.254: CC3200MOD.P8 20.23,28.74 v20.3,28.67 | v44.6,28.06 44.6,26.57 45.26,26.58 47.52,26.58 47.86,26.24 47.86,23.28 48.22,22.92 49.05,22.92 U11.GPIO_17_CS
  Bottom 0.254: v20.3,28.67 20.54,28.67 20.87,28.34 44.6,28.35 v44.6,28.06
N$12  (via drill 0.5)
  Top 0.254: U11.GPIO_14_SP_CLK 2.13,12.69 1.6,13.22 1.6,18.54 v1.46,18.8 | v23.93,31.15 23.93,30.43 CC3200MOD.P5
  Route15 0.254: v23.94,18.42 v23.94,31.14 v23.93,31.15
  Bottom 0.254: v1.46,18.8 13.06,18.79 13.4,18.4 23.92,18.4 v23.94,18.42
N$13  (via drill 0.5)
  Top 0.254: v13.31,24.1 13.31,25.59 12.8,26.1 CC3200MOD.P19
  Bottom 0.254: U11.GPIO_28 49.12,24.86 48.37,24.11 v13.32,24.11 v13.31,24.1
N$14  (via drill 0.5)
  Top 0.254: v7.19,15.97 7.2,10.38 6.78,9.96 6.13,9.96 U11.GPIO_30 | v27.46,16.17 27.46,14.66 CC3200MOD.P42
  Bottom 0.254: v27.46,16.17 7.23,16.17 v7.19,15.97
N$15
  Top 0.305: 40.7,5.7 39.9,4.9 USB.1
  Top 0.406: L3.1 40.7,5.7 | USB.1
N$16  (via drill 0.5)
  Top 0.305: USB.2 39.3,4.19 v39.3,5.4 | v32.5,2.4 32.82,2.5 R4.1
  Route2 0.305: v39.3,5.4 39.3,2.3 32.5,2.3 v32.5,2.4
N$17
  Top 0.254: R9.2 12.05,38.82 12.31,38.44 15.42,38.44 15.82,38.04 U2.12
N$18  (via drill 0.5)
  Top 0.254: CC3200MOD.P51 29.68,24.83 30.06,25.21 30.06,26.03 v30.13,26.04
  Route15 0.254: v30.13,26.04 30.13,17.73 v30.21,17.65
  Bottom 0.254: v30.21,17.65 15.88,17.67 15.29,17.08 15.29,16.84 15.16,16.71 3.73,16.71 3.36,17.08 3.36,17.73 U11.GPIO_06
N$19  (via drill 0.5)
  Top 0.254: CC3200MOD.P49 28.23,22.29 v27.82,22.7 | v7.51,22.12 7.51,21.82 7.15,21.46 2.46,21.46 2.25,21.13 2.25,15.51 2.46,15.18 3.35,15.18 U11.GPIO_04
  Bottom 0.254: v7.51,22.12 7.68,22.29 28.24,22.29 v27.83,22.7 v27.82,22.7
N$20
  Top 0.254: R10.2 12.27,37.17 12.88,37.78 15.19,37.78 15.32,37.65 U2.13
N$21  (via drill 0.5)
  Top 0.254: CC3200MOD.P52 28.21,26.1 v27.79,25.68 | v7.27,17.51 7.25,17.2 7.05,17.04 6.81,17.04 6.25,16.48 4.79,16.48 4.75,16.44 4.75,10.36 4.42,10.03 3.52,10.03 U11.GPIO_07
  Route15 0.254: v14.33,25.71 v14.33,17.51
  Bottom 0.254: v27.79,25.68 14.36,25.68 v14.33,25.71 | v14.33,17.51 v7.27,17.51
N$22  (via drill 0.5)
  Top 0.254: CC3200MOD.P53 27.89,27.37 v27.8,27.56
  Route15 0.254: v8.24,28 v8.24,13.25
  Bottom 0.254: v27.8,27.56 8.82,27.56 v8.24,28 | v8.24,13.25 6.5,13.25 U11.GPIO_08
N$23  (via drill 0.5)
  Top 0.305: v30.16,32.53 30.16,29.1 29.72,28.66 29.15,28.66 CC3200MOD.P54
  Route15 0.305: U11.GPIO_09 4.71,7.61 4.67,7.65 4.67,32.33 v4.29,32.61
  Bottom 0.305: v4.29,32.61 30.08,32.61 v30.16,32.53
N$24  (via drill 0.5, 0.6)
  Top 0.305: R2.1 44.1,13.94 v44.1,15.1 | v38.2,5.45 38.59,5.1 USB.3
  Route15 0.305: v44.1,15.1 43.4,15.1 43.4,6.2 38.2,6.2 v38.2,5.45
N$25  (via drill 0.5)
  Top 0.254: CC3200MOD.P9 18.96,28.91 18.95,28.9 18.95,28.79 v18.74,28.43
  Route15 0.254: v15.57,28.41 15.58,19.26 v15.51,19.24
  Bottom 0.254: v18.74,28.43 16.18,28.41 v15.57,28.41 | v15.51,19.24 3.65,19.27 3.42,19.5 3.42,20.29 U11.GPIO_12_TX
N$26
  Top 0.254: PWR.A 22.31,31.97 21.94,31.6 17.62,31.6 17.28,31.94 U2.6
N$27  (via drill 0.5)
  Top 0.254: CC3200MOD.P48 28.66,21.02 v28.32,20.68
  Route15 0.254: v12.5,20.97 12.51,23.61 v12.26,23.92
  Bottom 0.254: v12.5,20.97 27.86,20.97 28.24,20.68 v28.32,20.68 | v12.26,23.92 3.7,23.92 3.45,24.17 3.45,25.34 U11.GPIO_03
N$28  (via drill 0.5)
  Top 0.254: v9,31.03 9.4,31.19 9.39,31.28
  Top 0.305: U2.5 16.32,31.55 15.92,31.29 9.39,31.28 v9,31.03
  Route2 0.254: 8.7,31.5 8.83,31.5 v9,31.03
  Route2 0.305: 8.7,31.5 v8.7,33.39
  Bottom 0.305: v8.7,33.39 9.65,33.39 THERMAL.2
N$29
  Top 0.254: U1.4 26.86,35.77 27.13,35.5 27.13,35.24 L2.1
N$30
  Top 0.254: U1.2 25.84,35.2 L2.2
N$31
  Top 0.254: U2.7 17.96,34.59 18.17,34.38 18.17,33.14 18.35,32.96 20.64,32.98 | 20.62,32.95 20.64,32.98 | 20.64,32.98 20.64,33.64 DONE.A
N$32
  Top 0.254: U2.8 18.31,35.09 CHG.A
N$33
  Top 0.254: R11.1 19.13,37 CHG.C
N$35
  Top 0.254: R12.1 20.46,35.93 DONE.C
N$36
  Top 0.254: R13.1 22.63,35.89 PWR.C
N$37  (via drill 0.5)
  Top 0.254: U2.2 14.82,32.45 14.54,32.21 7.99,32.21 7.59,32.57 7.59,34.19 R15.2
  Top 0.305: R14.1 13.71,39.24 v13.07,39.88 | v7.59,39.88 7.59,34.21 R15.2
  Bottom 0.305: v13.07,39.88 v7.59,39.88
N$38  (via drill 0.5)
  Top 0.254: U$1.43 30.38,11.12 v30,11.5 | v25.4,3.1 25.52,3.1 C2.2
  Route15 0.254: Q1.2 25.72,3.42 v25.4,3.1
  Bottom 0.254: v30,11.5 30,11.1 29.45,10.75 28.8,10.75 28.6,10.55 26.86,10.55 Q1.2
N$39
  Top 0.254: U$1.48 31.34,8.04 31,7.7 30.9,7.7 | 30.9,7.7 30.1,7.7 29.75,7.7 U5.5 | 30.9,7.7 30.9,5.75 R27.1
N$40
  Top 0.254: C3.2 27.56,10.84 Q1.1 28.45,11.4 29.3,11 29.63,10.62 U$1.44
N$41  (via drill 0.5)
  Top 0.254: U$1.1 32.52,7.12 v32.2,6.8 | v29.6,6.8 28.16,6.8 U5.4 27.51,6.76 R30.1
  Bottom 0.254: v32.2,6.8 v29.6,6.8
N$42  (via drill 0.5)
  Top 0.254: R32.1 31.4,4.5 31.7,4.8 31.7,5.9 31.9,6.05 33.2,6.05 33.3,6.2 33.3,7.08 U$1.2 33.3,7.16 33.3,8.3 33.15,8.5 v33.15,9.15 | v26.45,6.8 25.72,6.8 U5.3
  Bottom 0.254: v33.15,9.15 32.6,10 32.55,10.05 29.4,10.05 29.25,9.9 28.3,9.9 28.3,7.1 28,6.8 v26.45,6.8
N$43  (via drill 0.5)
  Top 0.254: U$1.6 35.34,6.04 v35.3,6 | v31.6,3.2 30.87,3.2 C4.2
  Bottom 0.254: v35.3,6 33.5,6 32.8,5.3 32.8,3.4 32.6,3.2 v31.6,3.2
N$44  (via drill 0.5)
  Top 0.254: R5.1 7.66,29.92 7.98,29.6 10.76,29.6 10.92,29.44 10.92,28.42 11.13,28.21 13.19,28.21 14.17,27.23 15.1,27.23 16.12,26.21 16.12,20.1 16.75,19.47 16.75,18.05 v17.91,16.89 | v26.87,12.33 27.48,12.79 31.07,12.64 U$1.40
  Route15 0.254: v26.52,16.9 26.52,12.38 v26.87,12.33
  Bottom 0.254: v17.91,16.89 26,16.89 26.05,16.94 26.44,16.94 v26.52,16.9
N$45  (via drill 0.5)
  Top 0.254: R6.1 v41.32,16.56 | v30.36,16.56 30.36,13.22 30.53,13.2 31.37,13.15 U$1.39
  Bottom 0.254: v41.32,16.56 v30.36,16.56
N$46  (via drill 0.5)
  Top 0.254: U$1.24 40.29,14.12 v40.61,14.6 | v32.71,31 32.04,29.92 R17.1
  Route15 0.254: v40.61,14.6 40.62,31.5 v40.63,31.79
  Bottom 0.254: v40.63,31.79 32.7,31.76 v32.71,31
N$47  (via drill 0.5)
  Top 0.254: U$1.19 38.1,11.62 v37.51,11.03 | v37.59,17.3 38.9,17.3 39,17.4 39,18.33 R19.1
  Route15 0.254: v37.51,11.03 37.51,17.3 v37.59,17.3
N$48  (via drill 0.5)
  Top 0.254: U$1.17 38.81,10.62 v38.64,10.6 | v38.64,30.99 38.79,32.31 R18.1
  Route15 0.254: v38.64,10.6 v38.64,30.99
N$49
  Top 0.254: U$3.5 39.99,24.91 40.6,24.3 40.6,21.1 R21.2
N$50  (via drill 0.5)
  Top 0.254: U$3.6 39.04,23.64 v39.56,23.2 | v32.94,17.46 33.16,18.38 R22.2
  Route15 0.254: v32.88,23.03 32.88,17.42 v32.94,17.46
  Bottom 0.254: v39.56,23.2 33.3,23.2 v32.88,23.03
N$51  (via drill 0.5)
  Top 0.254: R23.1 42.1,7.52 v42.22,7.54 | v30.12,9.33 30.22,9.26 30.25,9.64 30.25,9.38 30.26,9.59 31.31,9.59 U$1.46
  Top 0.305: C5.2 R23.1
  Bottom 0.254: v42.22,7.54 30.16,7.54 v30.12,9.33
N$52
  Top 0.254: U$4.P5 38.88,35.91 39.09,35.7 39.79,35.7 39.98,35.51 39.98,34.75 R25.2
N$53
  Top 0.406: R24.1 46.08,3.1 S1.4 S1.3
N$54  (via drill 0.5)
  Top 0.254: U5.1 25.68,9.12 v25,9.35 | v25,4.6 28.2,4.6 | 28.2,4.6 29.45,4.6 R32.2 | R31.1 30.85,1.95 30.4,2.5 28.6,2.5 28.4,2.6 28.4,4.4 28.2,4.6
  Route15 0.254: v25,9.35 v25,4.6
N$55
  Top 0.254: R33.2 39,7.25 39,6.2 37.34,6.2 U$1.10
N$56
  Top 0.254: U$1.26 37.84,16.39 38,16.55 39.55,16.55 R34.2
N_RESET  (via drill 0.5, 0.6)
  Top 0.254: R22.1 v31.37,19.28 | v19.59,19.28 19.51,19.28 19.18,18.95 19.18,14.48 CC3200MOD.P35 18.93,12.32 24.27,12.35 24.26,0.75 25.3,0.75 25.35,0.8 | R26.2 25.33,0.97 25.35,0.8 | 25.35,0.8 32.43,0.8 v32.55,1.07
  Top 0.406: S1.1 S1.2 51.35,1.25 v51.35,1.66
  Route2 0.254: v51.35,1.66 51.35,2.99 50.45,3.89 50.45,16.98 49.71,17.72 49.17,17.72 U11.RESET_OUT
  Bottom 0.254: v31.37,19.28 v19.59,19.28 | v51.35,1.66 32.55,1.66 v32.55,1.07
OUT  (via drill 0.5)
  Top 0.254: U2.20 13.35,33.32 13.55,33.12 U2.1 13.14,33.12 v12.9,33.37 | U1.6 27.67,39.54 27.92,39.29 27.92,36.87 27.94,36.85 27.68,36.59 U1.5 28.04,36.59 28.26,36.37 28.26,33.82 C12.1 27.93,33.37 v28.98,33.38
  Top 0.305: U1.6 U1.7 U1.8
  Bottom 0.254: v12.9,33.37 28.86,33.37 v28.98,33.38
SOP2  (via drill 0.5)
  Top 0.254: U11.GPIO_25 49.18,10.09 49.77,10.09 50.37,10.69 50.37,13.28 49.86,13.79 48.25,13.79 47.82,14.22 47.82,18.5 47.26,19.06 45.34,19.06 44.48,19.92 R3.1 44.61,20.4 v44.61,25.58 | R16.1 31.92,25.93 v31.94,25.91 32.03,25.82 v32.03,25.08 | CC3200MOD.P23 11.12,21.02 v11.42,21.01
  Route15 0.254: v11.42,21.01 11.39,24.67 v11.63,24.91 11.63,28.97 v11.7,29.04 | v3.9,29.25 3.9,30.67 3.55,31.02 3.55,34.29 3.53,34.23 4.92,34.23 5.36,34.71 5.36,36.93 5.52,37.09 5.52,37.68 SOP2.1
  Bottom 0.254: v31.94,25.91 44.28,25.91 v44.61,25.58 | v11.63,24.91 31.86,24.91 v32.03,25.08 | v11.7,29.04 4.11,29.04 v3.9,29.25
TCK
  Top 0.254: R16.2 37.21,27.43 U$3.3
USB_DM
  Top 0.254: U$1.8 36.34,5.8 36.09,5.29 32.54,5.29 32.56,5.27 32.56,4.46 R4.2
USB_DP  (via drill 0.5)
  Top 0.254: R2.2 R1.1 41.75,11.04 41.74,10.88 41.74,8.44 v41.39,8.29 | v35.84,8.25 U$1.7
  Bottom 0.254: v41.39,8.29 35.85,8.29 v35.84,8.25
VCC  (via drill 0.5)
  Top 0.254: U1.1 24.95,36.59 24.75,36.79 24.75,39.34 24.95,39.54 U1.10 25.36,40.27 25.47,40.33 29.26,40.33 29.61,40.03 29.61,39.9 | U$1.14 38.6,9.12 | 38.6,9.12 36.13,9.12 35.66,9.62 | 35.66,9.62 v35.59,9.69 | v35.59,9.69 35.52,9.77 35.52,14.37 35.32,14.53 35.32,14.72 | 35.32,14.72 35.32,15.6 U$1.31 35.34,16.7 35.36,16.88 v35.56,17.31 R20.2 | 29.61,39.9 29.61,39.09 C8.1 | 42.61,36.35 U$3.14 42.61,34.39 41.65,33.37 35.27,33.37 v35.25,33.36 34.97,33.64 C10.1 C6.1 34.98,37.82 R29.2 | 42.61,36.35 42.61,38.66 41.17,40.28 39.71,40.28 | 39.71,40.28 29.81,40.28 29.61,39.9 | SOP2.2 2.88,28.45 U11.3.3V | CC3200MOD.P37 21.51,14.96 21.73,15.18 25.06,15.18 25.36,14.88 25.36,14.74 | CC3200MOD.P40 25.36,14.31 25.36,14.74 | 25.36,14.74 v25.72,15.21 | 35.32,14.72 35.27,14.49 32.46,14.49 v31.74,15.21 | U$4.P3 38.4,36.9 38.97,36.9 39.38,37.31 U$4.P11 39.38,38.43 39.71,38.76 R28.2 39.71,40.28 | U$4.P7 42.59,36.34 42.61,36.35 | R26.1 27.89,2 v27.91,1.88 28.19,1.7 R31.2 | v35.59,9.69 35.66,9.62 | v29.05,8.6 29.06,8.64 U5.6 28.08,8.6 | R27.2 v28.8,5.7 28.5,5.4 R30.2 | R33.1 41.05,7.6 40.65,8.05 38.95,8.05 38.6,8.35 38.6,9.12
  Top 0.305: CC3200MOD.P36 CC3200MOD.P37 | 24.75,36.79 24.75,36.73 v24.34,35.85
  Route15 0.254: v35.25,33.36 35.3,17.2 v35.56,17.31 | v27.91,1.88 30.68,1.98 30.8,2.4 30.8,8.6 | 30.8,8.6 31.2,9.25 31.66,9.91 35.38,9.91 v35.59,9.69 | 30.8,8.6 v29.05,8.6 28.8,8.4 v28.8,5.7
  Bottom 0.254: v25.72,15.21 v31.74,15.21
  Bottom 0.305: v24.34,35.85 3.85,35.93 2.88,37.15 SOP2.2